# EAGLE board Tinkercad_project (EAGLE 9.7.0)

Size 196.8 x 186.38 mm. Coordinates in mm from the lower left corner, seen from the top.
Outline: 0,0 196.8,0 196.8,186.38 0,186.38 0,0
Copper layers (1*16): Top 0.035mm / dielectric 1.5mm / Bottom 0.035mm
Design rules "default": minimum track width 6mil, minimum drill 0.35mm, track to track 6mil, track to pad 6mil, pad to pad 6mil, via to via 6mil, smd to smd 6mil, copper to edge 40mil, drill to drill 6mil, minimum pad ring 10mil, minimum via ring 8mil, stop-mask expansion 4mil, vias tented up to drill 0mil, thermal gap 10mil

## Footprints (pad centres in the part's own frame; a part is rotated, then mirrored left to right if it is on the bottom)
LEDRD254W60D565H860B_W = drill 0.981 pad 1.581: 1 -1.27,0; 2 1.27,0
28027 = drill 1.016 long: 1 -2.54,0; 2 0,0; 3 2.54,0
RESAD1016W63L850D250B = drill 0.83 pad 1.43: 1 -5.08,0; 2 5.08,0
GL5528 = drill 0.8 pad 1.4: 1 -1.702,0; 2 1.702,0
ARDUINO-UNO-R3-SHIELD = drill 1.016 pad 1.88: 3.3V 24.13,-2.54; 5V 24.13,0; A0 24.13,12.7; A1 24.13,15.24; A2 24.13,17.78; A3 24.13,20.32; A4 24.13,22.86; A5 24.13,25.4; AREF -24.13,-13.97; D2 -24.13,20.32; D3 -24.13,17.78; D4 -24.13,15.24; D5 -24.13,12.7; D6 -24.13,10.16; D7 -24.13,7.62; D8 -24.13,3.81; D9 -24.13,1.27; D10 -24.13,-1.27; D11 -24.13,-3.81; D12 -24.13,-6.35; D13 -24.13,-8.89; GND@0 24.13,2.54; GND@1 24.13,5.08; GND@2 -24.13,-11.43; IOREF 24.13,-7.62; NC 24.13,-10.16; RES 24.13,-5.08; RX -24.13,25.4; SCL -24.13,-19.05; SDA -24.13,-16.51; TX -24.13,22.86; VIN 24.13,7.62

## Placement (x,y rotation side)
D2  WHITE  [LEDRD254W60D565H860B_W]  22.89,117.64 180 top
D3  WHITE  [LEDRD254W60D565H860B_W]  55.91,117.64 180 top
D4  WHITE  [LEDRD254W60D565H860B_W]  99.09,117.64 180 top
D5  WHITE  [LEDRD254W60D565H860B_W]  134.65,117.64 180 top
D6  WHITE  [LEDRD254W60D565H860B_W]  160.05,117.64 180 top
PIR1  PIR-SENSOR_28027  [28027]  20.95,179.27 0 top
PIR2  PIR-SENSOR_28027  [28027]  59.01,179.5 0 top
PIR3  PIR-SENSOR_28027  [28027]  97.51,179.83 0 top
PIR4  PIR-SENSOR_28027  [28027]  135.73,180.03 0 top
PIR5  PIR-SENSOR_28027  [28027]  175.85,179.91 0 top
R1  220  [RESAD1016W63L850D250B]  24.16,107.48 90 top
R2  220  [RESAD1016W63L850D250B]  57.18,107.48 90 top
R3  220  [RESAD1016W63L850D250B]  100.36,107.48 90 top
R4  220  [RESAD1016W63L850D250B]  135.92,107.48 90 top
R5  220  [RESAD1016W63L850D250B]  161.32,107.48 90 top
R6  PHOTOCELL_GL5528  [GL5528]  78.77,104.94 0 top
R7  1k  [RESAD1016W63L850D250B]  72.42,99.86 0 top
U1  ARDUINO-UNO-R3-SHIELD  [ARDUINO-UNO-R3-SHIELD]  126.35,29.84 270 top

## Library data of the parts
D2-D6 = Tinkercad; CATEGORY: Opto-Electronic; SUB-CATEGORY: LED; VALUE: LED_WHITE
PIR1-PIR5 R1-R7 U1 = Tinkercad

## Nets
D2_A: D2.1 R1.2
D3_A: D3.1 R2.2
D4_A: D4.1 R3.2
D6_A: D6.1 R5.2
U1_5V: PIR1.2 PIR2.2 PIR3.2 PIR4.2 PIR5.2 R6.2 U1.5V
U1_A0: R6.1 R7.2 U1.A0
U1_D2: PIR5.1 U1.D2
U1_D3: PIR4.1 U1.D3
U1_D4: PIR3.1 U1.D4
U1_D5: PIR2.1 U1.D5
U1_D6: PIR1.1 U1.D6
U1_D9: R5.1 U1.D9
U1_D10: R4.1 U1.D10
U1_D11: R3.1 U1.D11
U1_D12: D5.1 R2.1 R4.2 U1.D12
U1_D13: R1.1 U1.D13
U1_GND: D2.2 D3.2 D4.2 D5.2 D6.2 PIR1.3 PIR2.3 PIR3.3 PIR4.3 PIR5.3 R7.1 U1.GND@0 U1.GND@1 U1.GND@2

## Tracks (layer width: path | path; a pad name or v marks a point on that pad's centre or on a via)
D2_A  (1 unrouted)
D3_A  (1 unrouted)
D4_A  (1 unrouted)
D6_A  (1 unrouted)
U1_5V  (6 unrouted)
U1_A0  (2 unrouted)
U1_D2  (1 unrouted)
U1_D3  (1 unrouted)
U1_D4  (1 unrouted)
U1_D5  (1 unrouted)
U1_D6  (1 unrouted)
U1_D9  (1 unrouted)
U1_D10  (1 unrouted)
U1_D11  (1 unrouted)
U1_D12  (3 unrouted)
U1_D13  (1 unrouted)
U1_GND  (13 unrouted)